# Altium PCB Opamp.PcbDoc
Units mil, origin at the board's own origin, x right, y up, seen from the top; angles counter-clockwise.
Board outline 6000 x 4000 mil, 2 copper layers (Top Layer, Bottom Layer); 18 components, 63 nets, 66 pads, 77 vias.
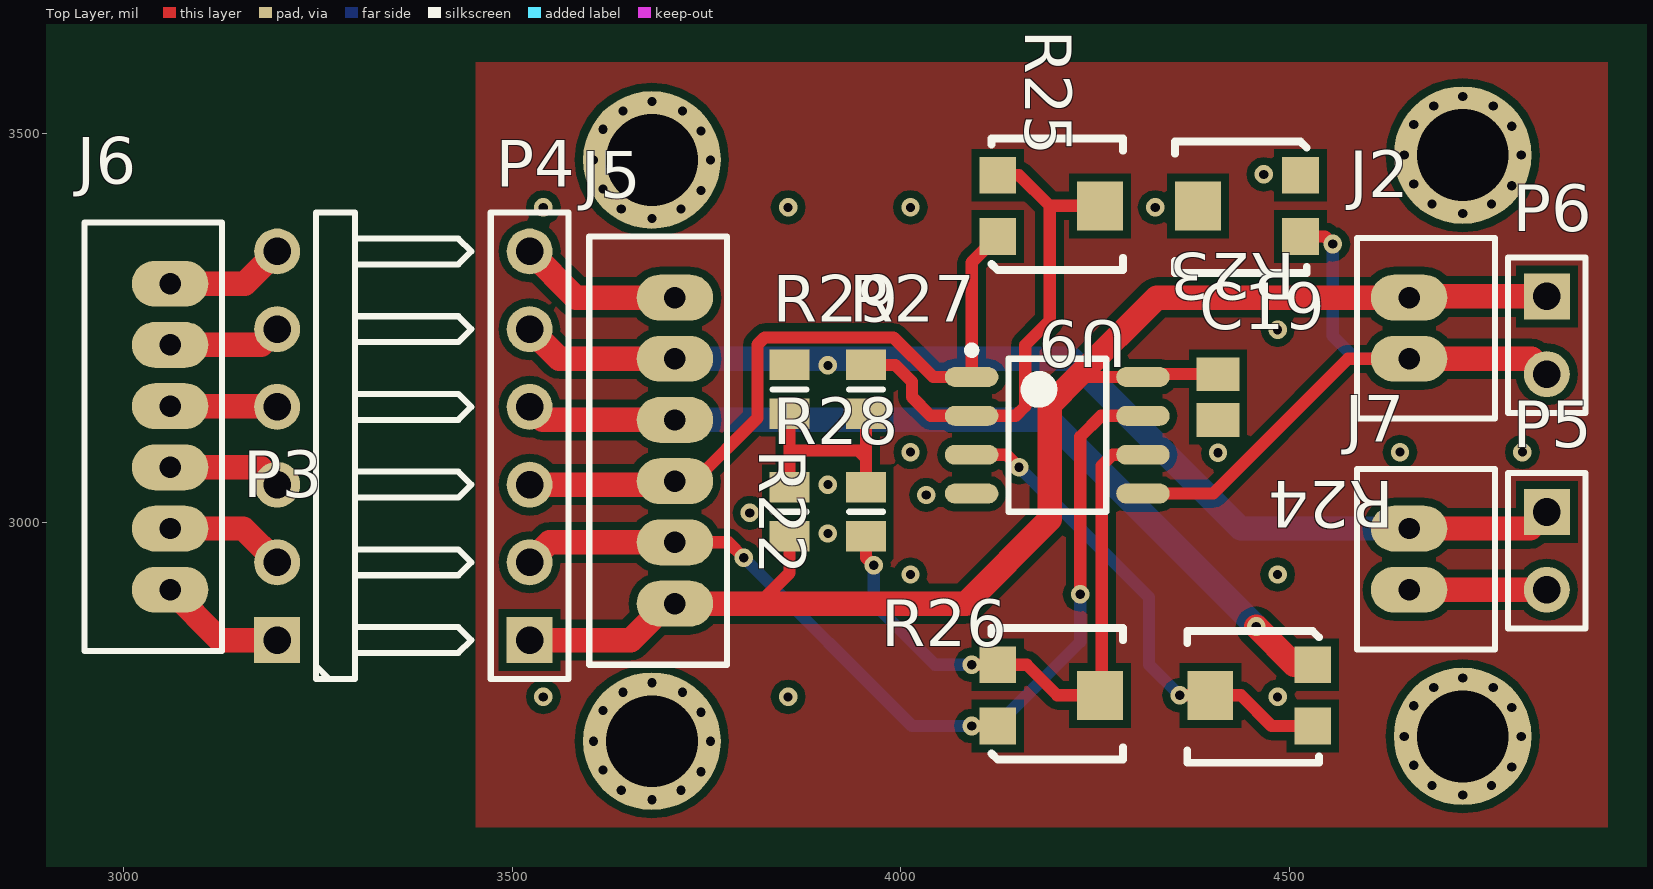
[diagram p0: Top Layer view]
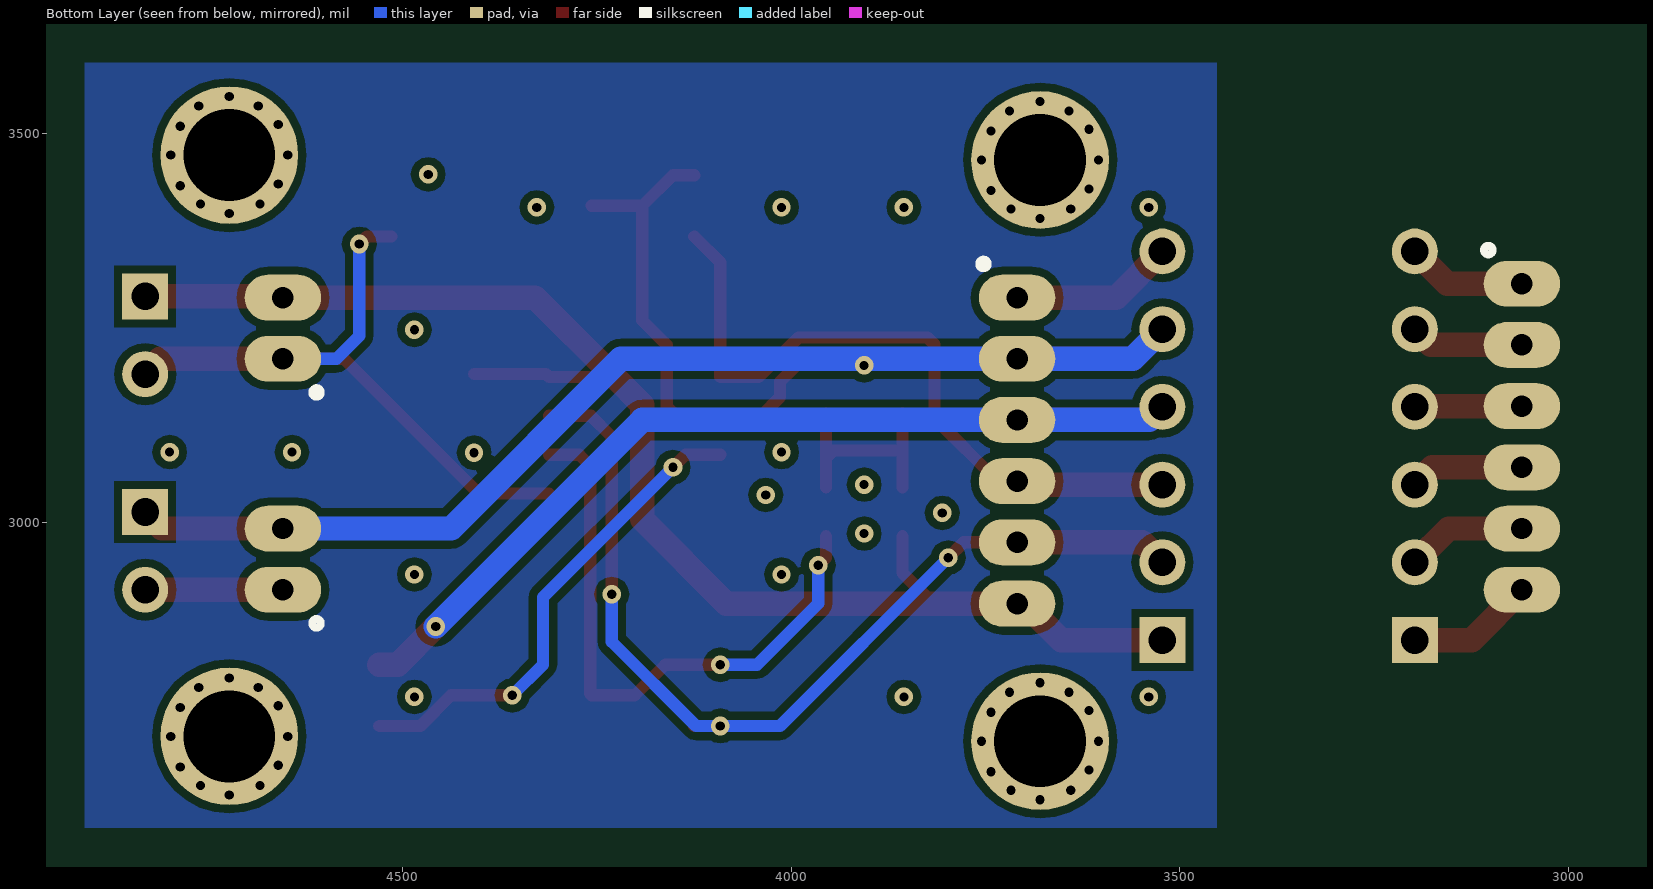
[diagram p1: Bottom Layer view, seen from below]

## Layer stack, top to bottom
Top Solder: solder mask 0.4, Solder Resist, Dk 3.5
Top Layer: signal copper 1.4
Dielectric 1: dielectric 12.6, FR-4, Dk 4.8
Bottom Layer: signal copper 1.4
Bottom Solder: solder mask 0.4, Solder Resist, Dk 3.5

## Board outline
1000,1000 7000,1000 7000,5000 1000,5000

## Design rules (kind name [scope] priority, off if disabled: settings)
Clearance [All] p1: gap=10 ignorepadtopadclearanceinfootprint=FALSE except(0: Arc-Hole Track-Hole SMDPad-Hole THPad-Hole Via-Hole Fill-Hole Poly-Hole Region-Hole Text-Hole)
PolygonConnect [All] p1: connectstyle=Relief reliefconductorwidth=10 reliefentries=4 polygonreliefangle="90 Angle" airgapwidth=10
RoutingVias [All] p1: holewidth=28 width=50 viastyle="Through Hole" minholewidth=28 minwidth=50 maxholewidth=28 maxwidth=50
SolderMaskExpansion [All] p1: expansion=4
Width [All] p1: maxlimit=10 minlimit=10 preferedwidth=10
30 further rules are at their usual default settings.

## Classes and differential pairs
component class Sensors: J2 J3 J4 J5 J6 P3 P4 P5 R22 R23
component class Power: J8 J9
component class "Main Schematic": J10

## Components (designator, comment, footprint, x,y, rotation, side; value= is the part's Value field where it differs from the comment)
C19 "Cap" C0805 4408.03,3161.2 r270 top value=0.1uF
J2 "B2B-PH-K-S(LF)(SN)" "JST B2B-PH-K" 4654.09,3249.79 r90 top
J5 "B6B-PH-K-S(LF)(SN)" "JST B6B-PH-K" 3709.21,3092.3 r270 top
J6 "B6B-PH-K-S(LF)(SN)" "JST B6B-PH-K" 3059.61,3110.14 r270 top
J7 "B2B-PH-K-S(LF)(SN)" "JST B2B-PH-K" 4654.09,2952.66 r90 top
P3 "Header 6H" HDR1X6H 3197.4,2848.53 r90 top
P4 "Header 6H" HDR1X6 3522.2,2848.53 r90 top
P5 "Conductivity" HDR1X2 4831.26,3013.29 r270 top
P6 "Temperature connector" HDR1X2 4831.26,3290.73 r270 top
R22 "Resistor" 6-0805_L 3955.28,3013.56 r270 top
R23 "Potentiometer" Trimmer 4447.4,3407.27 r180 top
R24 "Potentiometer" Trimmer 4463.15,2777.34 r180 top
R25 "Potentiometer" Trimmer 4191.5,3407.27 r0 top
R26 "Potentiometer" Trimmer 4191.5,2777.34 r0 top
R27 "Resistor" 6-0805_L 3955.28,3171.05 r90 top value=20K
R28 "Resistor" 6-0805_L 3856.85,3013.56 r270 top value=10K
R29 "Resistor" 6-0805_L 3856.85,3171.05 r270 top value=10K
U9 "MCP6002A" SOIC127P600-8N 4201.34,3111.99 r0 top

## Footprints (in the part's own frame and the unit in brackets; to place one, negate y for a bottom-side part, rotate by r counter-clockwise, add the part's x,y. Pads: shape width x height; smd on the part's side, far side on the other; paste and mask are expansions set on the pad)
6-0805_L [mm] "Chip Resistor, Body 2.0x1.2mm, IPC High Density"
  rect 1x1.3 smd: 1(-0.8,0) 2(0.8,0)
  silkscreen extent 0,-0.55 0,0.55, body extent -1.07,-0.7 1.07,0.7, height 0.7
C0805 [mm] "Chip Capacitor, Body 2.0x1.3mm, IPC High Density"
  rect 1.1x1.4 smd: 1(-0.75,0) 2(0.75,0)
  body extent -1.1,-0.72 1.1,0.72, height 1.4
HDR1X2 [mm] "Connector; Header; 2 Position"
  rect 1.5x1.5 hole 0.9: 1(0,0)
  round 1.5 hole 0.9: 2(2.54,0)
  silkscreen extent -1.27,-1.27 3.81,1.27
HDR1X6 [mm] "Connector; Header; 6 Position"
  rect 1.5x1.5 hole 0.9: 1(0,0)
  round 1.5 hole 0.9: 2(2.54,0) 3(5.08,0) 4(7.62,0) 5(10.16,0) 6(12.7,0)
  silkscreen extent -1.27,-1.27 13.97,1.27
HDR1X6H [mm] "Connector; Header; 6 Position; Right Angle"
  rect 1.5x1.5 hole 0.9: 1(0,0)
  round 1.5 hole 0.9: 2(2.54,0) 3(5.08,0) 4(7.62,0) 5(10.16,0) 6(12.7,0)
  silkscreen extent -1.27,-6.35 13.97,-1.27
"JST B2B-PH-K" [mm]
  oval 1.5x2.5 hole 0.7: 1(-1,0) 2(1,0)
  silkscreen extent -2.95,-2.8 2.95,1.7, body extent -2.95,-2.8 2.95,1.7, height 6
"JST B6B-PH-K" [mm]
  oval 1.5x2.5 hole 0.7: 1(-5,0) 2(-3,0) 3(-1,0) 4(1,0) 5(3,0) 6(5,0)
  silkscreen extent -7,-2.8 7,1.7, body extent -6.95,-2.8 6.95,1.7, height 6
SOIC127P600-8N [mm]
  oval 1.75x0.65 smd: 1(-2.8,1.905) 2(-2.8,0.635) 3(-2.8,-0.635) 4(-2.8,-1.905) 5(2.8,-1.905) 6(2.8,-0.635) 7(2.8,0.635) 8(2.8,1.905)
  silkscreen extent -2.92,-2.5 1.6,2.9, body extent -3,-2.5 3,2.5, height 1.75
Trimmer [mm]
  rect 1.2x1.2 smd: 1(-1.7,1) 2(-1.7,-1)
  rect 1.5x1.6 smd: 3(1.65,0)
  silkscreen extent -1.9,-2.1 2.4,2.2, body extent -1.8,-2 2.2,2, height 1.7

## Part data
C19: "Capacitor", LatestRevisionDate=17-Jul-2002, LatestRevisionNote="Re-released for DXP Platform.", PackageDescription="Radial Cap, Thru-Hole; 2 Leads; 0.3 in Pin Spacing", PackageReference=RAD-0.3, Published=8-Jun-2000, Publisher="Altium Limited"
J2: library part B3B-PH-K-S(LF)(SN), "CONN HEADER PH TOP 3POS 2MM", Colour=Natural, Manufacturer="JST Sales America Inc.", Supplier Part Number 1=455-1705-ND, ComponentLink1Description=Datasheet, ComponentLink1URL=http://www.jst-mfg.com/product/pdf/eng/ePH.pdf, ComponentLink2Description="Digi-Key Listing", ComponentLink2URL=http://www.digikey.com/product-detail/en/jst-sales-america-inc/B3B-PH-K-S(LF)(SN)/455-1705-ND/926612, Contact Finish=Tin, Fastening Type="Detent Lock", Number Of Positions=3, Number Of Rows=1, PartId=29448, Part Number=B3B-PH-K-S(LF)(SN), Pitch="0.079\" (2.00mm)", Price=0,19, Series=PH, Supplier 1=Digi-Key, Type="Header, Shrouded"
J5 J6: library part B2B-PH-K-S(LF)(SN), "CONN HEADER PH TOP 2POS 2MM", Colour=Natural, Manufacturer="JST Sales America Inc.", Supplier Part Number 1=455-1704-ND, ComponentLink1Description=Datasheet, ComponentLink1URL=http://www.jst-mfg.com/product/pdf/eng/ePH.pdf, ComponentLink2Description="Digi-Key Listing", ComponentLink2URL=http://www.digikey.com/product-detail/en/jst-sales-america-inc/B2B-PH-K-S(LF)(SN)/455-1704-ND/926611, Contact Finish=Tin, Fastening Type="Detent Lock", Number Of Positions=2, Number Of Rows=1, PartId=29447, Part Number=B2B-PH-K-S(LF)(SN), Pitch="0.079\" (2.00mm)", Price=0,17, Series=PH, Supplier 1=Digi-Key, Type="Header, Shrouded"
J7: "CONN HEADER PH TOP 2POS 2MM", Colour=Natural, Manufacturer="JST Sales America Inc.", Supplier Part Number 1=455-1704-ND, ComponentLink1Description=Datasheet, ComponentLink1URL=http://www.jst-mfg.com/product/pdf/eng/ePH.pdf, ComponentLink2Description="Digi-Key Listing", ComponentLink2URL=http://www.digikey.com/product-detail/en/jst-sales-america-inc/B2B-PH-K-S(LF)(SN)/455-1704-ND/926611, Contact Finish=Tin, Fastening Type="Detent Lock", Number Of Positions=2, Number Of Rows=1, PartId=29447, Part Number=B2B-PH-K-S(LF)(SN), Pitch="0.079\" (2.00mm)", Price=0,17, Series=PH, Supplier 1=Digi-Key, Type="Header, Shrouded"
P3: library part "Header 3", "Header, 3-Pin", LatestRevisionDate=17-Jul-2002, LatestRevisionNote="Re-released for DXP Platform.", Publisher="Altium Limited"
P4 P5 P6: library part "Header 2", "Header, 2-Pin", LatestRevisionDate=17-Jul-2002, LatestRevisionNote="Re-released for DXP Platform.", Publisher="Altium Limited"
R22: library part Potentiometer
R27 R28 R29: Package=0602, Power Rating=1/4W, Tolerance=1%

## Free pads (board coordinates)
  round 177.17 hole 118.11: 2(3679.68,2718.29) 2(3679.68,3466.32) 2(4722.99,2724.51) 2(4722.99,3472.54)

## Via types
v1: diameter 23.62, hole 11.81, Top Layer to Bottom Layer, 68 vias
v2: diameter 24.02, hole 12.01, Top Layer to Bottom Layer, 9 vias

## Nets (pads, with @x,y where several pads share a name; then routed paths per layer and width w, separated by ;. In a path a pad name is that pad's centre, name@x,y a point inside that pad or via, vN(x,y) a via of type N, cw(c..) or ccw(c..) an arc to the next point about the centre after c; other vN are vias at no path point)
3.3V: 
\E\N\: 
AD0: 
AD1: 
AD2: 
AD3: 
AD4: 
AD5: 
ANT50: 
CAL: 
CS: 
d+: 
d-: 
EN_PH: 
EN_RADIO: 
EN_SENSORS: 
GND: 
IO2: 
IO3: 
IO4: 
IO5: 
IO6: 
IO10: 
IO11: 
IO12: 
IO13: 
lora_rx: 
lora_tx: 
MISO: 
MOSI: 
NetC6_1: 
NetC10_1: 
NetC10_2: 
NetC11_1: 
NetC12_1: 
NetC14_1: 
NetC15_1: 
NetC17_1: 
NetC18_1: 
NetD1_1: 
NetD2_2: 
NetF1_1: 
NetJ3_3: 
NetJ10_S: 
NetL1_2: 
NetL2_1: 
NetL2_2: 
NetR3_1: 
NetR3_2: 
NetR5_2: 
NetR6_2: 
NetR9_1: 
NetR10_1: 
NetR15_1: 
NetU5_3: 
PV: 
RESET: 
SCK: 
VBAT: 
VCC_PH: 
VCC_RADIO: 
VCC_SENSORS: 
VSTOR: 
pads on no net: C19.1 C19.2 J2.1 J2.2 J5.1 J5.2 J5.3 J5.4 J5.5 J5.6 J6.1 J6.2 J6.3 J6.4 J6.5 J6.6 J7.1 J7.2 P3.1 P3.2 P3.3 P3.4 P3.5 P3.6 P4.1 P4.2 P4.3 P4.4 P4.5 P4.6 P5.1 P5.2 P6.1 P6.2 R22.1 R22.2 R23.1 R23.2 R23.3 R24.1 R24.2 R24.3 R25.1 R25.2 R25.3 R26.1 R26.2 R26.3 R27.1 R27.2 R28.1 R28.2 R29.1 R29.2 U9.1 U9.2 U9.3 U9.4 U9.5 U9.6 U9.7 U9.8
copper on no net: | length 11529.6
  Top Layer w15.75: 3709.21,2974.19 3778.11,2974.19 v2(3797.8,2954.51) ; 3709.21,3052.93 3734.21,3052.93 3815.51,3134.23 3815.51,3228.75 3824.74,3237.97 3990.65,3237.97 4041.63,3186.99 4091.1,3186.99 4091.1,3334.43 4124.57,3367.9 ; 3817.48,2895.45 3856.85,2934.82 3856.85,2982.07 ; 3856.85,3045.06 3856.85,3092.3 ; 3856.85,3139.55 3856.85,3092.3 ; 3955.28,2982.07 3955.28,2954.51 v2(3965.12,2944.67) ; 3955.28,3045.06 3955.28,3082.46 ; 3955.28,3139.55 3955.28,3082.46 ; 3955.28,3202.54 3992.68,3202.54 4014.33,3180.89 4014.33,3161.2 4038.54,3136.99 4147.6,3136.99 4160,3149.39 4160,3228.13 4191.5,3259.63 4191.5,3407.27 ; v2(4091.1,2737.97) 4124.57,2737.97 ; v2(4091.1,2816.71) 4124.57,2816.71 4161.97,2816.71 4201.34,2777.34 4256.46,2777.34 4258.62,2779.51 4258.62,3072.93 4272.68,3086.99 4311.57,3086.99 ; 4091.1,3086.99 4135.9,3086.99 v2(4152.13,3070.77) ; 4124.57,3446.64 4152.13,3446.64 4191.5,3407.27 ; 4227.13,3186.99 4311.57,3186.99 4315.31,3190.73 4408.03,3190.73 ; v2(4230.87,2907.46) 4230.87,3110.14 4257.72,3136.99 4311.57,3136.99 ; 4256.46,3407.27 4191.5,3407.27 ; 4311.57,3036.99 4401.93,3036.99 4575.35,3210.42 4654.09,3210.42 ; v2(4358.82,2777.34) 4398.19,2777.34 4437.56,2777.34 4476.93,2737.97 4530.08,2737.97 ; 4514.33,3367.9 4545.83,3367.9 v2(4555.67,3358.05) ; 3856.85,3092.3 3945.43,3092.3 3955.28,3082.46
  Top Layer w31.5: 3059.61,2913.29 3124.37,2848.53 3197.4,2848.53 ; 3059.61,2992.03 3153.9,2992.03 3197.4,2948.53 ; 3059.61,3070.77 3175.16,3070.77 3197.4,3048.53 ; 3059.61,3149.51 3196.42,3149.51 3197.4,3148.53 ; 3059.61,3228.25 3177.12,3228.25 3197.4,3248.53 ; 3059.61,3306.99 3155.87,3306.99 3197.4,3348.53 ; 3522.2,2848.53 3652.44,2848.53 3699.37,2895.45 3709.21,2895.45 3817.48,2895.45 4083.23,2895.45 4191.5,3003.72 4191.5,3151.36 4227.13,3186.99 4329.29,3289.16 4654.09,3289.16 4655.67,3290.73 4831.26,3290.73 ; 3522.2,2948.53 3547.87,2974.19 3709.21,2974.19 ; 3522.2,3048.53 3704.8,3048.53 3709.21,3052.93 ; 3522.2,3148.53 3539.06,3131.68 3709.21,3131.68 ; 3522.2,3248.53 3560.31,3210.42 3699.37,3210.42 ; 3522.2,3348.53 3581.57,3289.16 3709.21,3289.16 ; v2(4457.24,2865.93) 4506.46,2816.71 4530.08,2816.71 ; 4654.09,2913.29 4831.26,2913.29 ; 4654.09,2992.03 4810,2992.03 4831.26,3013.29 ; 4654.09,3210.42 4811.57,3210.42 4831.26,3190.73
  Bottom Layer w15.75: v2(3797.8,2954.51) 4014.33,2737.97 v2(4091.1,2737.97) 4122.6,2737.97 4230.87,2846.24 v2(4230.87,2907.46) ; v2(3965.12,2944.67) 3965.12,2895.45 4043.86,2816.71 v2(4091.1,2816.71) ; v2(4152.13,3070.77) 4319.45,2903.45 4319.45,2816.71 v2(4358.82,2777.34) ; v2(4555.67,3358.05) 4555.67,3239.94 4585.2,3210.42 4654.09,3210.42
  Bottom Layer w31.5: 3522.2,3148.53 3539.06,3131.68 3709.21,3131.68 4191.5,3131.68 v2(4457.24,2865.93) ; 3522.2,3248.53 3560.31,3210.42 3699.37,3210.42 ; 3709.21,3210.42 4219.17,3210.42 4437.56,2992.03 4654.09,2992.03
  other v1: 3679.68,2642.99 4722.99,2649.21 3640.32,2655.21 3716.91,2655.21 4683.62,2661.43 4760.21,2661.43 3742.77,2678.92 3616.6,2681.07 4786.07,2685.14 4659.91,2687.29 3604.39,2718.29 3754.98,2718.29 4647.7,2724.51 4798.29,2724.51 3742.77,2755.51 3616.6,2757.66 4786.07,2761.73 4659.91,2763.88 3539.92,2775.38 3854.88,2775.38 4484.8,2775.38 3642.46,2781.37 3719.05,2781.37 4685.77,2787.59 4762.36,2787.59 3679.68,2793.59 4722.99,2799.81 4012.36,2932.86 4484.8,2932.86 3906.06,2985.55 3805.55,3012.09 4032.68,3035.22 3906.06,3048.53 4408.03,3089.5 4012.36,3090.34 4642.28,3090.34 4799.76,3090.34 3906.06,3201.89 4484.8,3247.82 3679.68,3391.02 4722.99,3397.24 3640.32,3403.24 3716.91,3403.24 3539.92,3405.3 3854.88,3405.3 4012.36,3405.3 4327.32,3405.3 4683.62,3409.46 4760.21,3409.46 3742.77,3426.95 3616.6,3429.1 4786.07,3433.17 4659.91,3435.32 4467.09,3447.74 3604.39,3466.32 3754.98,3466.32 4647.7,3472.54 4798.29,3472.54 3742.77,3503.54 3616.6,3505.69 4786.07,3509.76 4659.91,3511.91 3642.46,3529.4 3719.05,3529.4 4685.77,3535.62 4762.36,3535.62 3679.68,3541.62 4722.99,3547.84

## Polygon pours and split planes (outlines as drawn)
no net on Top Layer "Top Layer-GND1" (solid, pour order 0): 3452.78,3591.84 3452.78,2607.58 4909.47,2607.58 4909.47,3591.84
no net on Bottom Layer "Bottom Layer-GND1" (solid, pour order 2): 3452.16,3591.2 3452.16,2606.95 4908.86,2606.95 4908.86,3591.2